# Altium PCB ZYNQ-HS-DEV-PCB.PcbDoc (part 4 of 13)
Units mm, origin at the board's own origin, x right, y up, seen from the top; angles counter-clockwise.
Board outline 125.73 x 111.93 mm, 10 copper layers (S1 (SIG), S2 (GND), S3 (SIG), S4 (GND), S5 (PWR), S6 (SIG), S7 (GND), S8 (SIG), S9 (GND), S10 (SIG)), stack 1.597 mm thick; 545 components, 400 nets, 2449 pads, 1577 vias.
Unrouted connection lines stored in the file: 309.
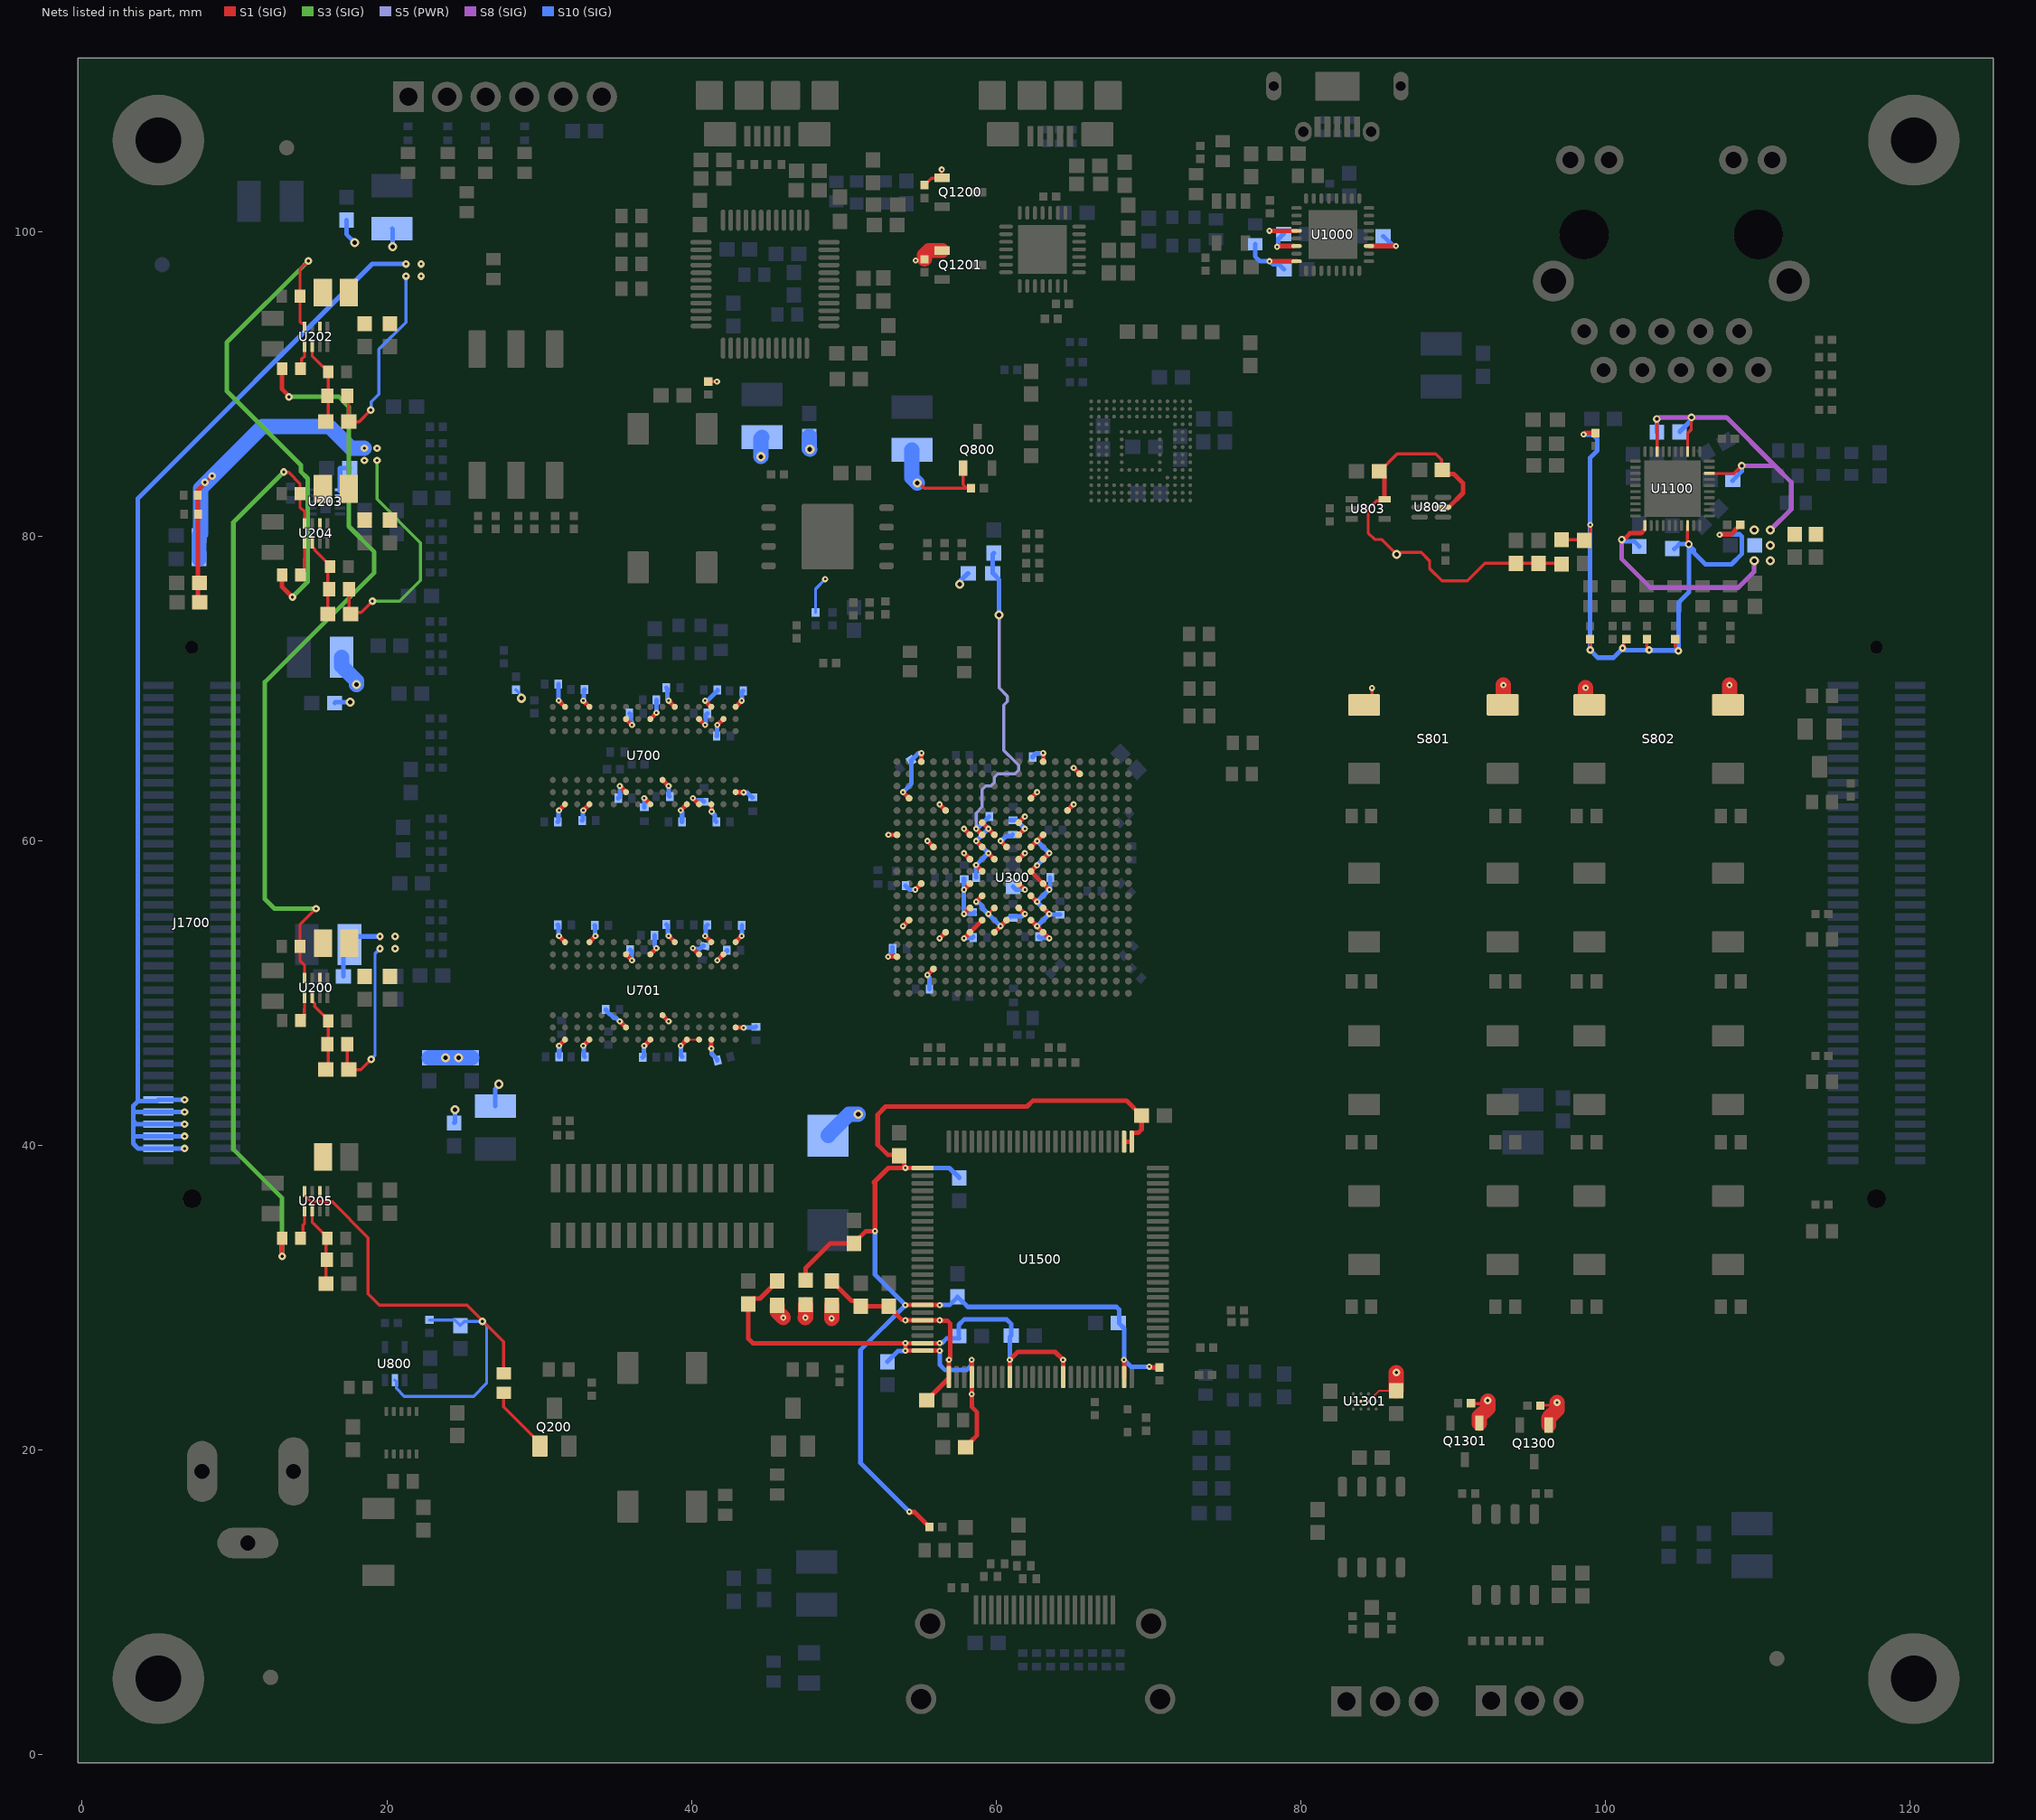
[diagram p11: the nets of this part, all layers, seen from the top]

## Via types
v1: diameter 0.4, hole 0.15, S1 (SIG) to S10 (SIG), tented both sides, 892 vias
v2: diameter 0.5, hole 0.2, S1 (SIG) to S10 (SIG), tented both sides, 231 vias
v3: diameter 0.6, hole 0.3, S1 (SIG) to S10 (SIG), tented both sides, 188 vias
v4: diameter 1, hole 0.5, S1 (SIG) to S10 (SIG), tented both sides, 158 vias
v5: diameter 0.5, hole 0.25, S1 (SIG) to S10 (SIG), tented both sides, 108 vias

## Nets (pads, with @x,y where several pads share a name; then routed paths per layer and width w, separated by ;. In a path a pad name is that pad's centre, name@x,y a point inside that pad or via, vN(x,y) a via of type N, cw(c..) or ccw(c..) an arc to the next point about the centre after c; other vN are vias at no path point) (continued)
+1V35: (continued)
  S10 (SIG) w0.2: R625.2@28.475,69.925 28.765,69.635 28.765,69.435 v3(28.841,69.359)
  S10 (SIG) w0.3: C345.2@16.575,69.05 16.625,69.1 v3(17.6,69.1) ; 16.925,82.95 U203.1@16.925,83.05 16.925,84.475 C214.2@17.56,84.475 ; C723.2@31.225,54.475 31.281,54.419 31.281,53.769 v1(31.3,53.75) ; C704.2@31.225,61.25 31.281,61.306 31.281,61.981 v1(31.3,62) ; C743.2@31.262,70.287 31.262,69.922 31.278,69.922 31.278,69.222 v1(31.29,69.21) ; v1(31.3,46.55) 31.313,46.537 31.313,45.837 C722.2@31.325,45.825 ; C703.2@32.825,61.325 32.881,61.381 32.881,61.981 v1(32.9,62) ; v1(32.9,46.55) 32.919,46.531 32.919,45.906 C710.2@33,45.825 ; v1(32.9,69.2) 32.919,69.219 32.919,69.869 C742.2@32.975,69.925 ; C711.2@33.65,54.45 33.681,54.419 33.681,53.769 v1(33.7,53.75) ; C740.2@34.375,48.925 34.375,48.875 34.65,48.6 34.696,48.6 34.921,48.375 35.048,48.375 35.273,48.15 v1(35.3,48.15) ; C702.2@35.2,62.8 35.3,62.9 35.3,63.126 v1(35.3,63.6) ; C744.2@35.925,68.375 36.025,68.275 36.025,67.937 36.045,67.917 36.045,67.855 36.081,67.82 36.081,67.619 v1(36.1,67.6) ; C729.2@35.975,52.85 36.075,52.75 36.075,52.202 36.1,52.177 v1(36.1,52.15) ; C709.2@36.8,45.8 36.881,45.881 36.881,46.531 v1(36.9,46.55) ; C705.2@36.9,62.2 v1(36.9,62.8) ; C726.2@37.575,53.8 37.575,53.102 37.7,52.977 v1(37.7,52.95) ; v1(37.7,68.4) C745.2@37.7,69.25 ; C725.2@38.35,54.5 38.45,54.4 38.45,53.827 38.5,53.777 v1(38.5,53.75) ; C731.2@38.35,70.05 38.427,69.973 38.427,69.3 38.5,69.227 v1(38.5,69.2) ; v1(38.5,63.6) 38.519,63.581 38.519,62.956 C701.2@38.575,62.9 ; v1(39.3,46.55) 39.319,46.531 39.319,45.906 C721.2@39.4,45.825 ; v1(39.3,62) 39.3,61.973 39.381,61.892 C718.2@39.381,61.244 ; v1(40.1,52.95) 40.127,52.95 40.157,52.92 40.545,52.92 40.725,53.1 C728.2@40.775,53.1 ; v1(40.1,62.8) 40.127,62.8 40.252,62.675 40.725,62.675 C716.2@40.825,62.575 ; v1(40.9,53.75) 40.9,53.777 40.95,53.827 40.95,54.375 C738.2@41.05,54.475 ; v1(40.9,67.6) 40.9,67.627 40.95,67.677 40.95,68.275 C734.2@41.05,68.375 ; v1(40.9,69.2) 40.919,69.219 41.069,69.219 41.7,69.85 C732.2@41.7,69.9 ; v1(41.3,46.375) 41.319,46.356 41.319,46.032 41.69,45.66 C737.2@41.69,45.584 ; v1(41.325,61.925) 41.325,61.898 41.534,61.689 41.534,61.344 C717.2@41.634,61.244 ; C735.2@41.65,66.875 41.681,66.906 41.681,67.581 v1(41.7,67.6) ; v1(41.7,52.15) 42.325,52.775 C727.2@42.325,52.825 ; v1(43.3,53.75) C739.2@43.3,54.45 ; v1(43.3,69.2) 43.319,69.219 43.319,69.769 C733.2@43.4,69.85 ; v1(43.425,47.725) 43.444,47.744 44.169,47.744 C708.2@44.225,47.8 ; v1(43.425,63.175) 43.444,63.156 43.669,63.156 43.975,62.85 C715.2@44.025,62.85 ; v1@52.913,52.406 53.2,52.693 C342.2@53.2,53.025 ; v1(53.888,63.195) 54.447,63.754 54.447,65.254 C343.2@54.419,65.283 54.893,65.757 v1(55.093,65.757) ; C344.2@54.05,57.05 54.305,56.795 v1(54.688,56.795) ; v1(55.488,51.195) 55.488,51.168 55.625,51.03 C341.2@55.625,50.275
  S10 (SIG) w1: C714.2@7.675,78.5 C741.2@7.675,80.05 7.775,80.15 7.775,83.125 11.85,87.2 16.219,87.2 17.644,85.775 v2(18.525,85.775) ; C346.1@17.025,72.05 17.025,71.475 18,70.5 v3(18,70.25)
  other v1: 52.925,60.4
  other v2: 18.525,84.975 19.35,85.776